# EAGLE board logger (EAGLE 8.1.0)
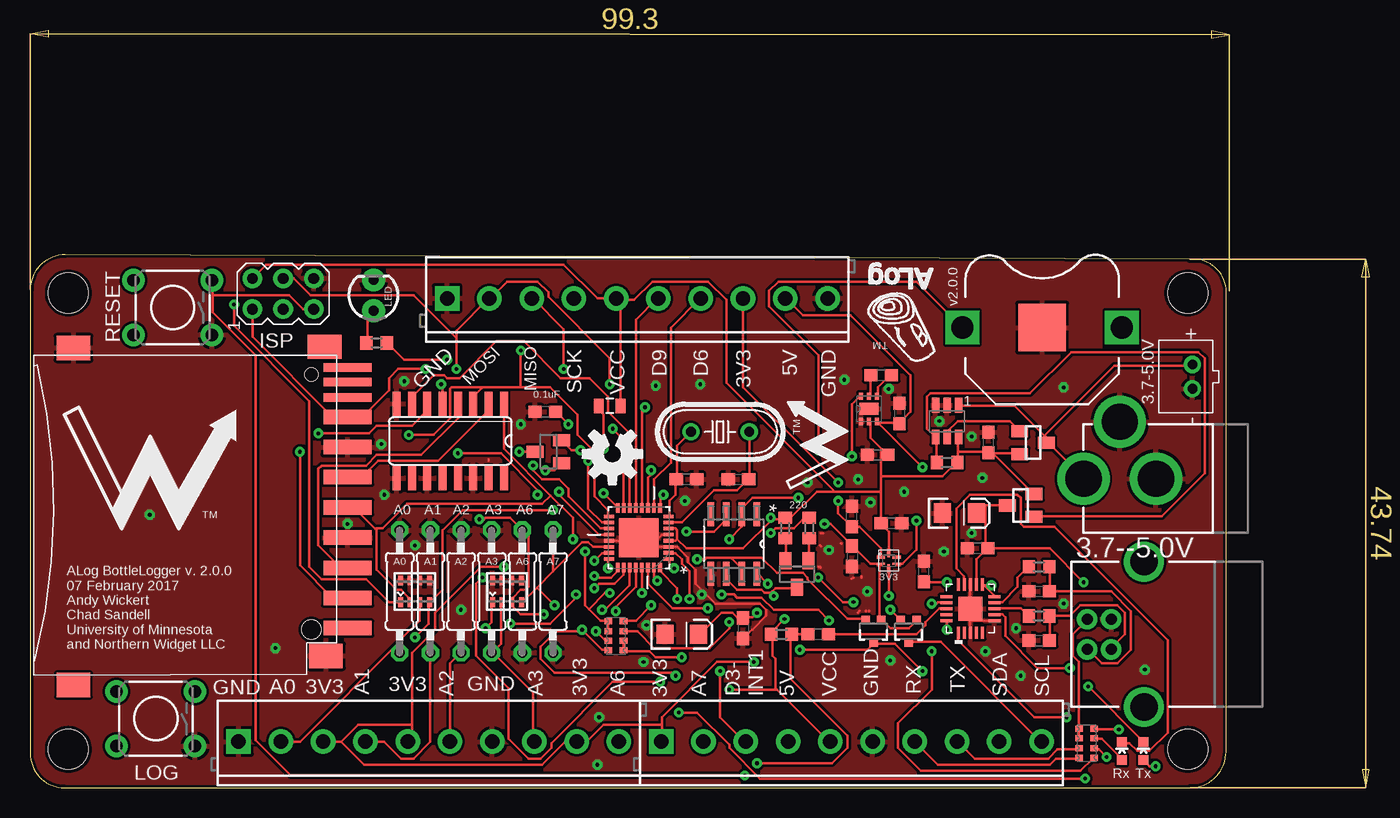
[diagram p0: board, top side]
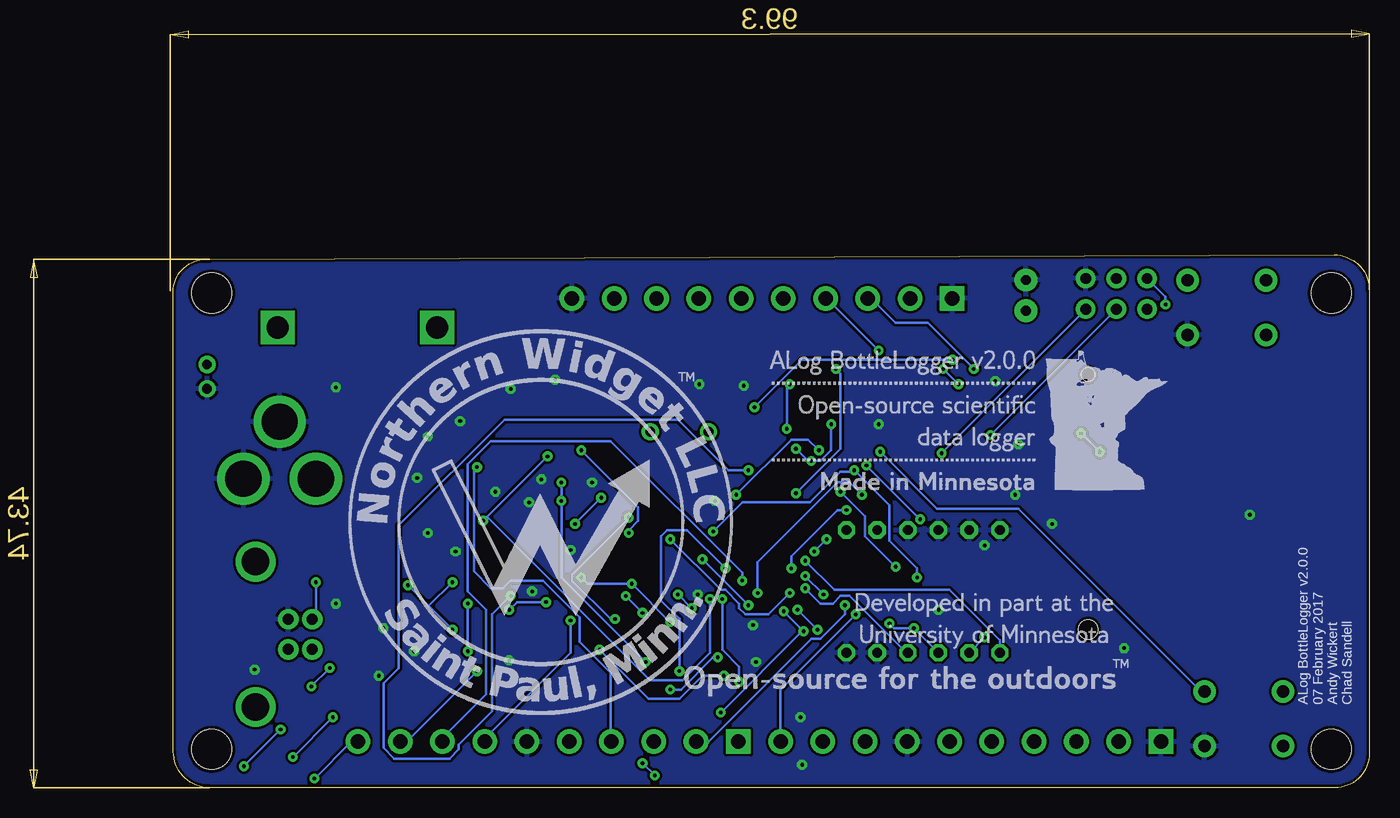
[diagram p1: board, bottom side, seen from below]

Size 99.05 x 44.12 mm. Coordinates in mm from the lower left corner, seen from the top.
Outline: 99.05,41.32 arc90 96.05,43.74 2.91,44.12 arc90 0,41.21 0,2.85 arc90 2.85,0 96.06,0 arc90 99.05,2.98 99.05,41.32
Copper layers (1*16): Top 0.035mm / dielectric 1.5mm / Bottom 0.035mm
Design rules "SparkFun *": minimum track width 8mil, minimum drill 12mil, track to track 8mil, track to pad 8mil, pad to pad 8mil, via to via 8mil, smd to smd 8mil, copper to edge 10mil, drill to drill 8mil, minimum pad ring 12mil, minimum via ring 10mil, stop-mask expansion 4mil, vias tented up to drill 25mil, thermal gap 10mil
Net classes: 0 default: width 0.203 mm, drill 0.305 mm; 1 power: width 0.305 mm, drill 0.508 mm; 2 gnd: width 0.61 mm, drill 0.508 mm, clearance 0.203 mm; 3 usbvcc: width 0.508 mm, drill 0.508 mm, clearance 0.152 mm; 4 aref: width 0.406 mm

## Footprints (pad centres in the part's own frame; a part is rotated, then mirrored left to right if it is on the bottom)
6-TMLF = smd 0.7 x 0.2: 1 -0.65,0.25; 2 -0.65,-0.25; 4 0.65,-0.25; 5 0.65,0.25 | smd 0.2 x 0.7: 3 0,-0.65; 6 0,0.65
SON65P200X200X80-7N = smd 0.61 x 0.356: 1 -1.041,0.66; 2 -1.041,0; 3 -1.041,-0.66; 4 1.041,-0.66; 5 1.041,0; 6 1.041,0.66 | smd 0.991 x 1.6: 7 0,0
0207/10 = drill 0.813 octagon: 1 -5.08,0; 2 5.08,0
C0603 = smd 1.1 x 1: 1 -0.85,0; 2 0.85,0
CECJ-1206 = smd 0.406 x 0.813: A1 -1.2,-0.9; A2 -1.2,0.9; B1 -0.4,-0.9; B2 -0.4,0.9; C1 0.4,-0.9; C2 0.4,0.9; D1 1.2,-0.9; D2 1.2,0.9
EIA3216 = smd 1.4 x 1.6: A 1.4,0; C -1.4,0
BATTCON_12MM_PTH = smd 3.962 x 3.962: GND 0,0 | drill 1.854 square: VCC@1 -6.604,0; VCC@2 6.604,0
JST-PH-2-THM = drill 0.8 pad 1.422: 1 1,0; 2 -1,0
SOT23C = smd 1 x 1.4: 1 -0.95,-1.1; 2 0.95,-1.1; 3 0,1.1
R0603 = smd 1 x 1.1: 1 -0.85,0; 2 0.85,0
SCREWTERMINAL-3.5MM-8 = drill 1.2 pad 2.032 square: 1 0,0 | drill 1.2 pad 2.032: 2 3.5,0; 3 7,0; 4 10.5,0; 5 14,0; 6 17.5,0; 7 21,0; 8 24.5,0; 9 28,0; 10 31.5,0
TSOT23-6 = smd 0.622 x 1.22: 1 -0.95,-1.31; 2 0,-1.31; 3 0.95,-1.31; 4 0.95,1.31; 5 0,1.31; 6 -0.95,1.31
AVRISP = drill 0.9 pad 1.626: 1 -1.27,2.54; 2 1.27,2.54; 3 -1.27,0; 4 1.27,0; 5 -1.27,-2.54; 6 1.27,-2.54
POWER_JACK_PTH = drill 2.997 pad 4.318: GND 0,7.7; GNDBREAK 4.7,10.7; PWR 0,13.7
STAND-OFF = hole 3.302: 0,0
USB-B-PTH = drill 0.914 pad 1.676: D+ 0,1.25; D- 1.981,1.25; GND 0,-1.25; VBUS 1.981,-1.25 | drill 2.286: S1 -2.718,-6.02; S2 -2.718,6.02
0805 = smd 0.8 x 1.2: 1 -0.9,0; 2 0.9,0
LED3MM = drill 0.813 pad 1.88: A -1.27,0; K 1.27,0
LED-0603 = smd 0.8 x 0.8: A 0,-0.75; C 0,0.75
TACTILE-PTH = drill 1.016 pad 1.88: 1 -3.251,2.261; 2 3.251,2.261; 3 -3.251,-2.261; 4 3.251,-2.261
SO16 = smd 0.66 x 2.032: 1 -4.445,-3.073; 2 -3.175,-3.073; 3 -1.905,-3.073; 4 -0.635,-3.073; 5 0.635,-3.073; 6 1.905,-3.073; 7 3.175,-3.073; 8 4.445,-3.073; 9 4.445,3.073; 10 3.175,3.073; 11 1.905,3.073; 12 0.635,3.073; 13 -0.635,3.073; 14 -1.905,3.073; 15 -3.175,3.073; 16 -4.445,3.073
QFN50P500X500X100-33N = smd 0.813 x 0.305: 1 -2.464,1.753; 2 -2.464,1.245; 3 -2.464,0.762; 4 -2.464,0.254; 5 -2.464,-0.254; 6 -2.464,-0.762; 7 -2.464,-1.245; 8 -2.464,-1.753; 17 2.464,-1.753; 18 2.464,-1.245; 19 2.464,-0.762; 20 2.464,-0.254; 21 2.464,0.254; 22 2.464,0.762; 23 2.464,1.245; 24 2.464,1.753 | smd 0.305 x 0.813: 9 -1.753,-2.464; 10 -1.245,-2.464; 11 -0.762,-2.464; 12 -0.254,-2.464; 13 0.254,-2.464; 14 0.762,-2.464; 15 1.245,-2.464; 16 1.753,-2.464; 25 1.753,2.464; 26 1.245,2.464; 27 0.762,2.464; 28 0.254,2.464; 29 -0.254,2.464; 30 -0.762,2.464; 31 -1.245,2.464; 32 -1.753,2.464 | smd 3.251 x 3.251: 33 0,0
SUPER-SOT3 = smd 1 x 1.4: 1 -0.95,-1.1; 2 0.95,-1.1; 3 0,1.1
SOT323 = smd 0.7 x 0.7: 1 -0.65,-0.925; 2 0.65,-0.925; 3 0,0.925
0603-ARC = smd 0.5 x 0.65: 1 -1.2,-0.625; 2 -0.4,-0.625; 3 0.4,-0.625; 4 1.2,-0.625; 5 1.2,0.625; 6 0.4,0.625; 7 -0.4,0.625; 8 -1.2,0.625
06132 = smd 1.2 x 4: 1 6.9,0.9; 2 4.4,0.9; 3 1.9,0.9; 4 -0.6,0.9; 5 -3.1,0.9; 6 -5.6,0.9; 7 -8.1,0.9; 9 9.4,0.9 | smd 0.7 x 4: 8 -9.7,0.9; CD -11,0.9; WP -12.2,0.9 | smd 2 x 2.8: GP -13.8,-21.8; GP2 14.1,-21.8; GP3 11.7,-0.9; GP4 -13.9,-1 | hole 1.1: -11.6,-2.1 | hole 1.6: 9.5,-2.1
21-0041B_8 = smd 1.981 x 0.533: 1 -2.464,1.905; 2 -2.464,0.635; 3 -2.464,-0.635; 4 -2.464,-1.905; 5 2.464,-1.905; 6 2.464,-0.635; 7 2.464,0.635; 8 2.464,1.905
QFN20 = smd 1 x 0.25: 1 -2.032,0.968; 2 -2.032,0.468; 3 -2.032,-0.032; 4 -2.032,-0.532; 5 -2.032,-1.032; 11 1.968,-1.032; 12 1.968,-0.532; 13 1.968,-0.032; 14 1.968,0.468; 15 1.968,0.968 | smd 0.25 x 1: 6 -1.032,-2.032; 7 -0.532,-2.032; 8 -0.032,-2.032; 9 0.468,-2.032; 10 0.968,-2.032; 16 0.968,1.968; 17 0.468,1.968; 18 -0.032,1.968; 19 -0.532,1.968; 20 -1.032,1.968 | smd 2 x 2: 21 -0.032,-0.032
HC49U-V = drill 0.813: 1 -2.413,0; 2 2.413,0

## Placement (x,y rotation side)
3V3  [6-TMLF]  71.11,18.8 0 top
5V_CHARGE_PUMP  5V  [SON65P200X200X80-7N]  69.47,31.37 90 top
A0  [0207/10]  30.6,16.26 270 top
A1  [0207/10]  33.14,16.26 270 top
A2  [0207/10]  35.68,16.26 270 top
A3  [0207/10]  38.22,16.26 270 top
A6  [0207/10]  40.76,16.26 270 top
A7  [0207/10]  43.3,16.26 270 top
ADECOUP  0.1uF  [C0603]  42.66,31.11 180 top
C1  0.1uF  [C0603]  74.03,17.91 90 top
C14  10nF  [CECJ-1206]  31.87,16.26 0 top
C15  10nF  [CECJ-1206]  39.49,16.26 0 top
C17  0.1uF  [C0603]  78.48,19.81 180 top
C21  10uF  [EIA3216]  76.95,22.73 0 top
C_BOOST_1  4.7uF  [C0603]  70.19,27.56 0 top
C_BOOST_2  2.2uF  [C0603]  70.48,34.16 0 top
C_BOOST_3  2.2uF  [C0603]  71.99,30.99 270 top
CLOCK_BATT  3V Backup Battery  [BATTCON_12MM_PTH]  83.81,38.1 0 top
CLOCK_BATT_DECOUP  0.1uF  [C0603]  59.05,13.21 270 top
CLOCK_BATT_DECOUPLE  10uF  [EIA3216]  53.97,12.7 0 top
CLOCK_CIN1  1uF  [C0603]  71.32,21.91 0 top
CLOCK_CIN2  1uF  [C0603]  68.05,22.45 90 top
CLOCK_CIN3  1uF  [C0603]  68.07,19.16 270 top
CN1  [JST-PH-2-THM]  96.26,34.04 90 top
COUT  1uF  [C0603]  79.36,28.57 90 top
COUT1  0.1uF  [C0603]  65.27,12.7 180 top
CX0  33pF  [C0603]  58.66,25.53 0 top
CX1  33pF  [C0603]  54.35,25.53 180 top
CX2  33pF  [C0603]  83.56,16.26 0 top
CX3  33pF  [C0603]  83.56,12.19 0 top
D1  BAT54C  [SOT23C]  63.51,17.69 180 top
D2  BAT54  [SOT23C]  42.92,27.81 90 top
D+  27ohm  [R0603]  83.56,14.22 0 top
D-  27ohm  [R0603]  83.56,18.29 0 top
H0  [SCREWTERMINAL-3.5MM-8]  17.26,3.81 0 top
H1  [SCREWTERMINAL-3.5MM-8]  52.26,3.81 0 top
H3  [SCREWTERMINAL-3.5MM-8]  34.53,40.51 0 top
IC1  LTC4412  [TSOT23-6]  75.94,30.35 180 top
ISP  AVRISP-6  [AVRISP]  20.94,40.89 90 top
J1  POWER_JACKPTH  [POWER_JACK_PTH]  100.94,25.59 90 top
JP1  STAND-OFF  [STAND-OFF]  3.17,3.17 0 top
JP2  STAND-OFF  [STAND-OFF]  95.88,40.96 90 top
JP3  STAND-OFF  [STAND-OFF]  95.88,3.17 90 top
JP4  STAND-OFF  [STAND-OFF]  3.17,40.96 0 top
JP5  USB-B  [USB-B-PTH]  89.52,12.7 180 top
L_LPF  10uH  [0805]  48,31.62 180 top
LED  [LED3MM]  28.44,40.77 90 top
LED1  Yellow  [LED-0603]  90.41,3.05 0 top
LED2  Blue  [LED-0603]  92.19,3.05 0 top
LOG  LOG  [TACTILE-PTH]  10.4,5.71 180 top
LOGO1  OSHW-LOGOM  [OSHW-LOGO-M]  48.22,27.62 180 top
LSHIFT  4050D  [SO16]  34.79,28.7 180 top
MCU  ATMEGA328P-MU  [QFN50P500X500X100-33N]  50.41,20.7 180 top
Q1  FDN360P  [SUPER-SOT3]  83.05,28.57 270 top
Q2  FDN360P  [SUPER-SOT3]  82.03,23.37 90 top
Q3  2N7002PW  [SOT323]  69.84,12.95 180 top
Q4  2N7002PW  [SOT323]  72.76,12.95 180 top
R_LED  220  [R0603]  28.69,36.83 180 top
R_RESET  10k  [R0603]  62.22,12.7 180 top
RCKL1  220  [R0603]  62.52,21.5 90 top
RCLK2  220  [R0603]  64.52,21.5 90 top
RESET  Reset  [TACTILE-PTH]  11.8,39.75 180 top
RN1  1K  [0603-ARC]  87.49,3.68 90 top
RN2  3.3K  [0603-ARC]  48.5,12.57 90 top
RSTAT  470k  [R0603]  75.94,26.92 0 top
SD  SDMMC06132  [06132]  25.39,22.61 270 top
U1  DS3231MZ/V+T  [21-0041B_8]  58.28,20.19 270 top
U2  FT231X-Q  [QFN20]  77.84,14.86 90 top
U$1  NWLOGO  [NWLOGO]  9.9,26.04 0 top
U$2  ALOG_LOGO_V1_5.5MM  [ALOG_LOGO_V1_SMALL]  72.07,38.22 180 top
U$3  NWLOGO_MED  [NWLOGO_MED]  64.76,28.32 90 top
U$9  ALOG-BACKSILK-2.0  [ALOG-BACKSILK-2.0]  84.57,5.97 0 top
XTAL  8MHz  [HC49U-V]  57.14,29.46 0 top

## Library data of the parts
3V3 = csandell
5V_CHARGE_PUMP = ti_by_element14; MPN: TPS60150DRVR; OC_FARNELL: -; OC_NEWARK: 45P8283; PACKAGE: SON-6; SUPPLIER: Texas Instruments
A0 A1-A3 A6 A7 ADECOUP C1 C17 C_BOOST_1-C_BOOST_3 CX0 CX1-CX3 R_LED = resistor
C14 C15 = rc-master-smd
C21 CLOCK_BATT_DECOUPLE = SparkFun-Passives
CLOCK_BATT J1 JP1-JP4 L_LPF LED XTAL = SparkFun
CLOCK_BATT_DECOUP CLOCK_CIN1-CLOCK_CIN3 COUT COUT1 D+ D- R_RESET RCKL1 RCLK2 RSTAT = rcl
CN1 ISP SD = adafruit
D1 D2 = semicon-smd-ipc
H0 H1 H3 = SparkFun-Connectors
IC1 U$1-U$3 = awickert
JP5 = SparkFun-Connectors; PROD_ID: CONN-08278
LED1 LED2 = SparkFun-LED
LOG RESET = SparkFun-Electromechanical; PROD_ID: SWCH-08441
LOGO1 = SparkFun-Aesthetics
LSHIFT = 40xx
MCU = Atmel_By_element14_Batch_1-00; MPN: ATMEGA328P-MU; OC_FARNELL: 1748522; OC_NEWARK: 26R2526; PACKAGE: QFN-32; SUPPLIER: Atmel
Q1 Q2 = transistor-power
Q3 Q4 = SparkFun-DiscreteSemi
RN1 RN2 = resistor-dil; OC_FARNELL: unknown; OC_NEWARK: unknown
U1 = Maxim-DS3231MZ_8-SOIC; MANUFACTURER_NAME: Maxim; MANUFACTURER_PART_NUMBER: DS3231MZ/V+T; VENDOR: Maxim
U2 = FT231X
U$9 = awickert_tmp

## Nets
5V: 5V_CHARGE_PUMP.3 C_BOOST_3.2 H1.4 H3.9
+3V3: 3V3.1 CLOCK_CIN2.1 H0.3 H0.5 H0.9 H1.1 H3.8 MCU.20
A0: A0.2 C14.C1 H0.2 MCU.23
A1: A1.2 C14.D1 H0.4 MCU.24
A2: A2.2 C15.A1 H0.6 MCU.25
A3: A3.2 C15.B1 H0.8 MCU.26
A6: A6.1 C15.C1 H0.10 MCU.19
A7: A7.1 C15.D1 H1.2 MCU.22
AVCC: ADECOUP.1 L_LPF.2 MCU.18
BAT: CLOCK_BATT_DECOUP.1 CLOCK_BATT_DECOUPLE.A D1.3 U1.6
CLK: H3.4 ISP.3 LSHIFT.3 MCU.17
CS-SD: LSHIFT.7 MCU.14
D3-INT1: H1.3 MCU.1
D4-SENSE_LDO_SWITCH: 3V3.4 5V_CHARGE_PUMP.6 MCU.2
D5_MANUAL_LOG: D2.2 MCU.9
D6-EXT: H3.7 MCU.10
D7-CLOCK_SD_SWITCH: 3V3.3 MCU.11
D8_LED: MCU.12 R_LED.1
D9-CS-EXT: H3.6 MCU.13
DI: H3.2 ISP.4 LSHIFT.5 MCU.15
DO: H3.3 ISP.1 MCU.16 SD.7
DTR: COUT1.1 U2.18
GND: 3V3.5 5V_CHARGE_PUMP.1 5V_CHARGE_PUMP.7 A0.1 A1.1 A2.1 A3.1 A6.2 A7.2 ADECOUP.2 C1.2 C14.A2 C14.B2 C14.C2 C14.D2 C15.A2 C15.B2 C15.C2 C15.D2 C17.2 C21.C C_BOOST_1.1 C_BOOST_3.1 CLOCK_BATT.GND CLOCK_BATT_DECOUP.2 CLOCK_BATT_DECOUPLE.C CLOCK_CIN1.2 CLOCK_CIN2.2 CLOCK_CIN3.2 CN1.2 COUT.2 CX0.1 CX1.1 CX2.1 CX3.1 H0.1 H0.7 H1.6 H3.1 H3.10 IC1.2 IC1.3 ISP.6 J1.GND J1.GNDBREAK JP5.GND LED.K LOG.1 LSHIFT.8 LSHIFT.9 LSHIFT.11 LSHIFT.14 MCU.3 MCU.5 MCU.21 MCU.33 RESET.1 SD.3 SD.6 SD.GP SD.GP3 U1.5 U2.3 U2.6 U2.13 U2.21
INT0: D2.1 MCU.32 U1.3
LED+: LED.A R_LED.2
N$1: D1.1 RCLK2.1
N$2: CLOCK_BATT.VCC@1 RCLK2.2
N$3: CX3.2 D+.2 JP5.D+
N$4: CX2.2 D-.2 JP5.D-
N$5: LED2.A RN1.4
N$6: LED2.C U2.7
N$7: IC1.4 Q2.1 RSTAT.1
N$8: IC1.5 Q1.1
N$9: LED1.A RN1.3
N$10: LED1.C U2.14
N$11: D2.3 LOG.3
N$13: D-.1 U2.9
N$14: 5V_CHARGE_PUMP.4 C_BOOST_2.2
N$15: 5V_CHARGE_PUMP.5 C_BOOST_2.1
N$16: D+.1 U2.8
N$17: C1.1 U2.10 U2.11 U2.20
N$27: RN1.1 U2.17
N$29: RN1.2 U2.1
N$67: D1.2 RCKL1.1
RESET: COUT1.2 ISP.5 MCU.29 R_RESET.1 RESET.3
RX-I: H1.7 MCU.30 RN1.8
SCL: H1.10 MCU.28 Q4.3 RN2.7
SCL_3V3: Q4.2 RN2.3 U1.8
SD_CLK: LSHIFT.2 SD.5
SD_CS: LSHIFT.6 SD.1
SD_DI: LSHIFT.4 SD.2
SDA: H1.9 MCU.27 Q3.3 RN2.8
SDA_3V3: Q3.2 RN2.4 U1.7
TX-O: H1.8 MCU.31 RN1.7
VBAT: CN1.1 IC1.1 J1.PWR Q1.3
VCC: 3V3.6 5V_CHARGE_PUMP.2 C14.A1 C_BOOST_1.2 CLOCK_CIN1.1 COUT.1 H1.5 H3.5 IC1.6 ISP.2 L_LPF.1 MCU.4 MCU.6 Q1.2 Q2.2 R_RESET.2 RCKL1.2 RN2.1 RN2.2 RSTAT.2
VDD: 3V3.2 C14.B1 CLOCK_CIN3.1 LSHIFT.1 Q3.1 Q4.1 RN2.5 RN2.6 SD.4 U1.2
VUSB: C17.1 C21.A JP5.VBUS Q2.3 RN1.5 RN1.6 U2.12
X0: CX0.2 MCU.7 XTAL.2
X1: CX1.2 MCU.8 XTAL.1

## Tracks (layer width: path | path; a pad name or v marks a point on that pad's centre or on a via)
5V  (via drill 0.3)
  Top 0.203: 70.22,30.23 71.87,30.23 C_BOOST_3.2 72,30.23 72.89,31.11 72.89,34.16 67.93,39.12 64,39.12 62.6,40.51 H3.9 | 70.22,30.23 v73.9,26.54 | 70.22,30.23 5V_CHARGE_PUMP.3
  Bottom 0.203: v73.9,26.54 74.16,26.29 74.16,17.91 72.76,16.51 71.74,16.51 71.11,17.14 68.44,17.14 65.39,14.1 65.39,12.06 62.86,9.53 62.86,3.81 H1.4
+3V3  (via drill 0.3)
  Top 0.203: v66.92,23.75 66.92,22.73 67.93,21.72 CLOCK_CIN2.1 68.68,21.6 70.47,19.81 70.47,19.06 3V3.1 | v66.92,25.27 59.05,33.15 59.05,40.51 H3.8 | MCU.20 47.11,20.95 43.8,24.26 v43.8,24.51 | v39.23,18.29 37.33,18.29 33.52,14.48 33.52,13.08 31.61,11.18 31.61,5.21 | 31.61,5.21 31.61,4.06 31.36,3.81 H0.5 | 25.77,3.81 H0.3 | 25.77,3.81 27.17,5.21 31.61,5.21 | 25.77,3.81 27.68,1.91 42.41,1.91 44.31,3.81 H0.9 46.09,3.81 47.49,5.21 52.31,5.21 | v59.93,10.41 56.89,10.41 52.31,5.84 52.31,5.21 | 52.31,5.21 52.31,3.81 H1.1
  Bottom 0.203: v66.92,25.27 v66.92,23.75 66.92,17.4 v59.93,10.41 | v43.8,24.51 41.77,22.48 41.77,20.83 v39.23,18.29
A0  (via drill 0.3)
  Top 0.203: A0.2 30.6,12.06 | 30.6,12.06 30.6,12.19 32.25,13.84 32.25,15.24 C14.C1 | v46.73,18.8 47.36,19.43 47.87,19.43 MCU.23 | H0.2 22.34,3.81 30.6,12.06
  Bottom 0.203: v46.73,18.8 44.31,16.38 34.79,16.38 30.6,12.19 A0.2
A1  (via drill 0.3)
  Top 0.203: v31.87,12.45 33.01,13.59 33.01,15.24 C14.D1 33.14,15.37 34.15,16.38 34.15,21.34 35.8,22.99 v43.3,22.99 | v47.87,18.16 47.87,18.92 MCU.24 | H0.4 29.33,3.81 30.72,2.41 31.74,2.41 33.14,3.81 A1.2
  Bottom 0.203: A1.2 v31.87,12.45 | v47.87,18.16 47.87,19.18 44.06,22.99 v43.3,22.99
A2  (via drill 0.3)
  Top 0.203: v37.71,13.21 38.22,13.72 38.22,15.24 C15.A1 | v46.73,17.53 46.85,17.4 48.12,17.4 48.63,17.91 48.63,18.16 MCU.25 | v45.2,16 45.2,15.75 43.04,13.59 v39.74,13.59 | A2.2 34.79,10.29 34.79,3.81 H0.6
  Bottom 0.203: A2.2 v37.71,13.21 39.36,13.21 v39.74,13.59 | v45.2,16 v46.73,17.53
A3  (via drill 0.3)
  Top 0.203: C15.B1 38.98,15.24 38.98,11.94 A3.2 38.34,11.18 41.65,7.87 41.65,3.81 H0.8 | v46.73,16.51 47.11,16.89 48.38,16.89 49.14,17.65 49.14,18.16 MCU.26
  Bottom 0.203: v46.73,16.51 45.46,15.24 44.44,15.24 43.8,15.88 43.04,15.88 38.34,11.18 A3.2
A6  (via drill 0.3)
  Top 0.203: MCU.19 47.23,21.46 44.57,24.13 44.57,24.77 43.8,25.53 42.41,25.53 41.65,26.29 v41.65,26.67 | v37.2,22.23 37.58,22.23 37.71,22.35 39.74,22.35 A6.1 41.27,20.83 41.27,16.64 41.01,16.38 40.63,16.38 40,15.75 40,15.37 C15.C1 40,15.24 40,14.99 40.63,14.35 v42.54,14.35
  Bottom 0.203: v37.2,22.23 v41.65,26.67 | v42.54,14.35 48.76,8.13 H0.10
A7  (via drill 0.3)
  Top 0.203: 43.3,17.91 41.96,16.57 | 41.96,16.57 40.76,15.37 C15.D1 | A7.1 43.3,17.91 | MCU.22 46.6,19.94 46.22,20.32 45.71,20.32 43.3,17.91 | 41.96,16.57 v43.42,15.11
  Bottom 0.203: H1.2 54.73,3.81 46.22,12.32 45.46,12.32 43.42,14.35 v43.42,15.11
AVCC  (via drill 0.3)
  Top 0.203: v46.22,27.05 46.22,23.11 47.36,21.97 47.87,21.97 MCU.18 | v47.49,28.07 47.49,30.86 47.11,31.24 L_LPF.2 | v44.57,30.1 43.55,31.11 ADECOUP.1
  Bottom 0.203: v47.49,28.07 46.47,27.05 v46.22,27.05 45.46,27.05 44.57,27.94 v44.57,30.1
BAT  (via drill 0.3)
  Top 0.203: 59.05,14.1 58.54,14.1 58.16,14.48 57.27,14.48 55.49,12.7 CLOCK_BATT_DECOUPLE.A | 61.33,16.13 61.71,16.51 63.49,16.51 D1.3 | 61.33,16.13 60.82,16.13 60.57,16.38 58.54,16.38 57.65,17.27 U1.6 | 59.05,14.1 59.81,14.1 v60.19,14.48 | 61.33,16.13 v61.59,15.88 | 59.05,14.1 CLOCK_BATT_DECOUP.1
  Bottom 0.203: v61.59,15.88 v60.19,14.48
CLK  (via drill 0.3)
  Top 0.203: 40.63,33.15 37.46,33.15 37.39,33.08 | 40.63,33.15 43.04,33.15 45.33,30.86 45.33,29.21 46.98,27.56 46.98,26.8 46.73,26.54 46.73,24.13 47.87,22.99 47.87,22.48 MCU.17 | 37.39,33.08 36.69,32.38 LSHIFT.3 | v31.36,29.21 33.39,29.21 34.79,30.61 34.79,33.02 34.91,33.15 37.33,33.15 37.39,33.08 | 40.63,33.15 v40.63,36.2
  Bottom 0.203: v31.36,29.21 ISP.3 | v40.63,36.2 44.95,40.51 H3.4
CS-SD
  Top 0.203: MCU.14 49.65,29.34 47.87,31.11 47.87,32.38 46.34,33.91 43.93,33.91 40.88,36.96 38.6,36.96 35.55,33.91 34.53,33.91 34.28,34.16 33.39,34.16 31.61,32.38 LSHIFT.7
D3-INT1  (via drill 0.3)
  Top 0.203: v53.33,18.16 52.95,18.54 52.95,18.92 MCU.1 | v57.14,9.65 57.14,5.84 59.17,3.81 H1.3
  Bottom 0.203: v53.33,18.16 56.51,21.34 58.16,21.34 58.66,20.83 58.66,15.49 57.14,13.97 v57.14,9.65
D4-SENSE_LDO_SWITCH  (via drill 0.3)
  Top 0.203: v68.06,27.43 68.06,31.75 68.7,32.38 5V_CHARGE_PUMP.6 | v73.4,22.1 73.4,19.68 72.25,18.54 71.87,18.54 3V3.4 | v54.6,15.62 54.6,17.91 53.97,18.54 53.97,18.92 53.46,19.43 52.95,19.43 MCU.2
  Bottom 0.203: v73.4,22.1 73.08,22.42 | 73.08,22.42 v68.06,27.43 | v54.6,15.62 54.6,11.18 56.89,8.89 59.55,8.89 73.08,22.42
D5_MANUAL_LOG  (via drill 0.3)
  Top 0.203: v52.44,24.26 52.19,24 52.19,23.24 MCU.9 | v45.58,27.94 44.82,27.94 44.06,28.7 D2.2
  Bottom 0.203: v52.44,24.26 47.87,28.83 46.47,28.83 v45.58,27.94
D6-EXT
  Top 0.203: MCU.10 51.68,23.24 51.68,25.53 53.08,26.92 53.08,38.1 55.49,40.51 H3.7
D7-CLOCK_SD_SWITCH  (via drill 0.3)
  Top 0.203: v71.11,15.88 3V3.3 | v51.43,26.29 51.43,25.91 51.17,25.65 MCU.11
  Bottom 0.203: v71.11,15.88 72.63,14.35 72.63,6.35 75.43,3.56 75.43,3.17 76.19,2.41 80.76,2.41 81.65,3.3 81.65,8.64 80.38,9.91 80.38,21.72 71.62,30.48 57.27,30.48 53.08,26.29 v51.43,26.29
D8_LED  (via drill 0.3)
  Top 0.203: MCU.12 50.66,31.24 v50.92,31.5 | v34.53,35.43 30.98,35.43 29.58,36.83 R_LED.1
  Bottom 0.203: v50.92,31.5 46.98,35.43 v34.53,35.43
D9-CS-EXT
  Top 0.203: MCU.13 50.16,38.73 51.93,40.51 H3.6
DI  (via drill 0.3)
  Top 0.203: v48.25,29.72 49.14,28.83 49.14,23.24 MCU.15 | v48,33.4 48,35.56 42.92,40.64 42.92,41.02 42.03,41.91 39.49,41.91 38.09,40.51 H3.2 37.96,40.51 35.3,37.85 35.3,37.21 | LSHIFT.5 34.15,33.27 v34.03,33.4 | 35.3,37.21 v35.3,34.67 | ISP.4 21.83,42.16 23.23,40.77 31.74,40.77 35.3,37.21
  Bottom 0.203: v48.25,29.72 48.25,33.15 v48,33.4 | v35.3,34.67 v34.03,33.4
DO  (via drill 0.3)
  Top 0.203: ISP.1 18.4,37.34 25.01,30.73 26.28,30.73 SD.7 26.41,30.73 27.55,30.73 29.71,32.89 29.71,33.91 30.47,34.67 v32.76,34.67 | v47.49,24.38 48.63,23.24 MCU.16 | v44.19,34.67 44.19,37.97 41.65,40.51 H3.3
  Bottom 0.203: v47.49,24.38 43.8,28.07 43.8,34.29 v44.19,34.67 | v32.76,34.67 36.57,38.48 39.23,38.48 41.27,40.51 H3.3
DTR
  Top 0.203: COUT1.1 73.4,12.7 74.16,13.46 74.16,13.72 75.3,14.86 75.81,14.86 U2.18
GND  (via drill 0.3)
  Top 0.203: 77.84,13.84 77.84,14.73 U2.21 | 77.84,13.84 77.84,12.83 U2.3 | U2.13 77.84,16.76 77.84,14.86 U2.21 | MCU.21 50.16,20.45 MCU.33 | 51.3,19.94 51.04,19.94 50.41,20.57 MCU.33 | 51.3,19.94 MCU.3 53.58,19.94 54.47,19.05 54.47,18.67 55.11,18.03 55.11,16.89 56.76,15.24 60.44,15.24 60.95,14.73 60.95,14.22 59.81,13.08 59.77,13.08 CLOCK_BATT_DECOUP.2 | MCU.5 52.31,20.95 51.3,19.94 | 51.3,19.94 MCU.33 | 77.84,13.84 79.87,13.84 U2.6 | 77.84,13.84 U2.21 | 65.27,18.29 65.37,18.24 | 65.37,18.24 65.43,18.21 | 68.57,14.48 68.67,14.63 | 68.82,17.53 68.85,17.39 | 68.19,18.16 68.02,18.26 | 67.93,18.35 67.93,18.16 CLOCK_CIN3.2 | 65.39,18.29 65.37,18.24 | 67.17,20.19 67.16,20.25 | 65.39,20.07 65.48,19.98 | 65.65,21.08 65.48,21.08 | 69.46,14.61 69.46,14.63 | 68.19,17.4 68.02,17.3 | 69.2,14.61 69.2,14.63 | 37.96,27.18 37.96,27.05
  other vias: 54.22,23.75 66.16,19.68 77.97,29.08 75.3,30.35 71.11,33.02 77.97,21.08 69.59,23.62 72.38,24.51 85.59,15.24 82.03,9.27 81.65,13.21 78.86,25.65 69.33,16.26 40.63,30.1 29.33,24.26 26.28,21.84 29.07,28.45 30.98,33.66 31.87,20.07 51.04,13.46 50.79,10.41 47.11,5.84 20.31,11.56 55.49,33.4 67.43,33.78 68.57,25.53 75.68,19.56 85.59,33.15 51.81,33.27 71.24,10.54 79.11,11.3 35.68,14.73 55.62,16 64.38,25.27 46.98,1.91 92.32,9.78 9.9,22.61
  pour Bottom: -0.33,44.45 -0.33,-0.32 99.37,-0.32 99.37,44.45
  pour Top: -0.65,44.77 -0.65,-0.64 99.68,-0.64 99.68,44.77
INT0  (via drill 0.3)
  Top 0.203: v53.58,15.62 53.58,16.51 52.19,17.91 52.19,18.16 MCU.32 | v52.19,8.76 48.25,8.76 43.17,3.68 43.17,3.3 42.28,2.41 41.27,2.41 39.61,4.06 39.61,8.26 36.95,10.92 36.95,16.89 v37.46,17.4 | v42.66,26.29 43.42,26.29 43.93,26.8 D2.1 | U1.3 57.65,22.23 56.63,21.21 v54.35,21.21
  Bottom 0.203: v53.58,15.62 53.58,11.43 52.19,10.03 v52.19,8.76 | v37.46,17.4 37.46,18.16 39.74,20.45 39.74,23.37 v42.66,26.29 42.66,26.16 43.8,26.16 46.34,23.62 51.93,23.62 v54.35,21.21
LED+
  Top 0.203: LED.A 27.93,38.99 27.93,36.83 R_LED.2
N$1
  Top 0.203: RCLK2.1 64.51,20.57 64.51,18.8 D1.1
N$2  (via drill 0.3)
  Top 0.203: v61.33,21.08 61.71,21.46 63.24,21.46 64,22.23 64.51,22.23 RCLK2.2 | v65.27,27.94 65.27,35.81 61.2,39.88 61.2,41.15 61.97,41.91 73.4,41.91 CLOCK_BATT.VCC@1
  Bottom 0.203: v61.33,21.08 61.33,21.34 60.57,22.1 60.57,23.24 v65.27,27.94
N$3
  Top 0.203: 84.44,14.22 84.44,12.19 CX3.2 | 84.44,14.22 86.1,14.22 86.98,15.11 90.03,15.11 90.67,14.48 90.67,12.7 89.52,11.56 JP5.D+ | 84.44,14.22 D+.2
N$4
  Top 0.203: 84.44,16.26 84.44,18.29 D-.2 | 84.44,16.26 89.52,16.26 91.18,14.61 91.18,11.43 90.03,10.29 88.76,10.29 87.62,11.43 JP5.D- | 84.44,16.26 CX2.2
N$5  (via drill 0.3)
  Top 0.203: v90.16,4.83 88.13,4.83 RN1.4 | v93.21,1.78 92.7,1.78 92.19,2.29 LED2.A
  Bottom 0.203: v93.21,1.78 v90.16,4.83
N$6  (via drill 0.3)
  Top 0.203: v87.62,8.38 LED2.C | v86.1,9.91 83.43,9.91 80.76,12.57 80.76,14.1 80.51,14.35 79.87,14.35 U2.7
  Bottom 0.203: v86.1,9.91 v87.62,8.38
N$7
  Top 0.203: RSTAT.1 75.05,26.92 75.05,28.96 IC1.4 74.92,29.08 74.28,29.72 74.28,32.38 74.54,32.64 82.79,32.64 86.22,36.07 96.76,36.07 97.27,35.56 97.27,26.04 93.72,22.48 83.17,22.48 Q2.1
N$8
  Top 0.203: IC1.5 75.94,29.46 76.82,30.35 81.14,30.35 81.91,29.59 Q1.1
N$9
  Top 0.203: RN1.3 88.13,4.06 88.76,4.06 90.41,2.41 LED1.A
N$10
  Top 0.203: LED1.C 90.41,3.68 91.05,3.68 91.68,3.05 92.7,3.05 94.22,4.57 94.22,12.19 84.83,21.59 82.29,21.59 82.03,21.84 82.03,24 81.78,24.26 77.84,24.26 76.7,23.11 76.7,18.16 77.33,17.53 77.33,16.89 U2.14
N$11  (via drill 0.3)
  Top 0.203: v40.5,27.81 D2.3
  Bottom 0.203: v40.5,27.81 35.8,23.11 29.07,23.11 13.96,8 13.71,8 LOG.3
N$13
  Top 0.203: U2.9 79.87,15.37 80.51,15.37 81.78,16.64 81.78,17.4 82.67,18.29 D-.1
N$14
  Top 0.203: 5V_CHARGE_PUMP.4 70.22,32.51 70.22,33.15 71.24,34.16 C_BOOST_2.2
N$15
  Top 0.203: 5V_CHARGE_PUMP.5 69.59,32.51 69.59,34.16 C_BOOST_2.1
N$16
  Top 0.203: U2.8 79.87,14.86 82.03,14.86 82.67,14.22 D+.1
N$17  (via drill 0.3)
  Top 0.203: v75.94,13.08 75.94,13.72 U2.20 | 78.98,16.76 v79.62,16.76 | 78.98,16.76 79.87,15.88 U2.10 | 78.98,16.76 U2.11 | v75.94,17.02 74.03,17.02 C1.1
  Bottom 0.203: v79.62,16.76 77.91,15.05 | 77.91,15.05 v75.94,13.08 | 77.91,15.05 v75.94,17.02
N$27  (via drill 0.3)
  Top 0.203: v74.67,11.3 74.67,8.13 71.87,5.33 71.87,3.3 73.78,1.4 86.98,1.4 88,2.41 RN1.1 | v74.67,15.24 75.05,15.24 75.17,15.37 75.81,15.37 U2.17
  Bottom 0.203: v74.67,15.24 v74.67,11.3
N$29  (via drill 0.3)
  Top 0.203: v89.14,2.54 88.51,3.17 88.13,3.17 RN1.2 | v85.84,5.84 83.17,5.84 76.82,12.19 76.82,12.83 U2.1
  Bottom 0.203: v85.84,5.84 v89.14,2.54
N$67
  Top 0.203: RCKL1.1 62.6,20.57 62.6,18.8 D1.2
RESET  (via drill 0.3)
  Top 0.203: v50.66,16.13 MCU.29 | v42.03,24.26 42.03,24.64 38.98,27.69 v35.42,27.69 | COUT1.2 R_RESET.1 62.98,12.7 62.98,9.02 67.68,4.32 67.68,3.3 66.41,2.03 v60.19,2.03 | v59.17,1.02 21.58,1.02 18.66,3.94 18.66,35.81 15.1,39.37 15.1,40.77 | 15.1,40.77 15.1,41.91 RESET.3 | ISP.5 22.6,39.62 21.45,40.77 15.1,40.77
  Bottom 0.203: v50.66,16.13 50.66,18.67 44.06,25.27 43.04,25.27 v42.03,24.26 | ISP.5 v35.42,27.69 | v59.17,1.02 v60.19,2.03
RX-I  (via drill 0.3)
  Top 0.203: RN1.8 86.86,2.41 84.95,2.41 84.44,1.91 75.17,1.91 H1.7 | MCU.30 51.17,16.89 53.2,14.86 v56.12,14.86 | v57.27,16 58.28,16 58.54,15.75 60.57,15.75 61.59,14.73 65.27,14.73 v66.16,13.84
  Bottom 0.203: v57.27,16 v56.12,14.86 | v66.16,13.84 66.16,11.18 73.14,4.19 73.14,3.81 H1.7
SCL  (via drill 0.3)
  Top 0.203: v46.85,12.95 47.62,12.19 47.87,12.19 RN2.7 | v48.5,14.61 48.5,14.99 50.16,16.64 MCU.28 | Q4.3 72.76,12.06 75.43,12.06 83.68,3.81 H1.10 | v53.71,6.22 55.23,6.22 57.9,3.56 57.9,3.3 60.44,0.76 v87.37,0.76
  Bottom 0.203: v48.5,14.61 v46.85,12.95 46.98,12.95 v53.71,6.22 | v87.37,0.76 84.32,3.81 H1.10
SCL_3V3  (via drill 0.3)
  Top 0.203: v57.9,13.72 57.9,13.21 56.25,11.56 51.68,11.56 50.28,12.95 49.14,12.95 RN2.3 | v61.08,16.89 60.19,17.78 U1.8 | v71.24,14.73 72,13.97 Q4.2 | v68.19,15.37 67.3,15.37 v65.27,17.4
  Bottom 0.203: v57.9,13.72 v61.08,16.89 64.76,16.89 v65.27,17.4 | v71.24,14.73 70.6,15.37 v68.19,15.37
SD_CLK
  Top 0.203: LSHIFT.2 37.96,31.24 33.77,27.05 28.82,27.05 27.55,25.78 26.41,25.78 SD.5
SD_CS  (via drill 0.3)
  Top 0.203: LSHIFT.6 32.88,31.24 31.61,29.97 28.69,29.97 28.06,29.34 v23.87,29.34 | v22.34,27.81 22.34,18.41 25.01,15.75 26.28,15.75 SD.1
  Bottom 0.203: v22.34,27.81 v23.87,29.34
SD_DI
  Top 0.203: LSHIFT.4 35.42,30.61 32.38,27.56 28.69,27.56 27.8,26.67 24.12,26.67 23.87,26.42 23.87,20.07 25.64,18.29 26.28,18.29 SD.2
SDA  (via drill 0.3)
  Top 0.203: v47.36,14.73 47.62,14.73 49.65,16.76 MCU.27 | RN2.8 47.87,11.43 47.36,11.43 v45.71,13.08 45.71,12.95 43.55,12.95 42.28,11.68 42.28,10.67 43.42,9.53 53.2,9.53 v53.46,9.27 | 69.84,11.94 71.62,11.94 v73.9,9.65 | v63.74,11.43 69.33,11.43 69.84,11.94 | 69.84,11.94 Q3.3
  Bottom 0.203: v47.36,14.73 v45.71,13.08 | v73.9,9.65 79.75,3.81 H1.9 | v53.46,9.27 55.23,9.27 57.14,7.37 59.68,7.37 v63.74,11.43
SDA_3V3  (via drill 0.3)
  Top 0.203: v51.43,15.11 50.16,13.84 49.14,13.84 RN2.4 | v55.23,18.92 55.87,18.92 56,19.05 58.03,19.05 58.09,18.99 | 58.09,18.99 58.92,18.16 U1.7 | Q3.2 69.08,13.97 67.68,13.97 64.38,17.27 64.38,17.4 64,17.78 61.84,17.78 60.57,19.05 58.16,19.05 58.09,18.99
  Bottom 0.203: v55.23,18.92 v51.43,15.11
TX-O  (via drill 0.3)
  Top 0.203: RN1.7 86.86,3.17 85.08,3.17 84.32,2.41 78.22,2.41 76.82,3.81 H1.8 | v51.93,17.14 51.68,17.4 51.68,18.16 MCU.31
  Bottom 0.203: v51.93,17.14 51.93,17.78 62.86,28.7 72.76,28.7 74.67,26.8 74.67,16.26 73.14,14.73 73.14,7.75 76.7,4.19 76.7,3.81 H1.8
VBAT
  Top 0.203: 84,29.15 84.06,29.08 84.06,28.83 | 84,29.15 81.52,31.62 76.95,31.62 IC1.1 | 84.06,28.83 84.06,28.57 Q1.3 84.06,28.83 | 84,29.15 89.78,34.92 96.26,34.92 CN1.1 | 84.06,28.83 87.24,25.65 J1.PWR
VCC  (via drill 0.3)
  Top 0.203: L_LPF.1 48.89,31.62 48.89,40.26 48.63,40.51 H3.5 | v16.88,40.01 16.88,38.23 23.1,32 23.1,18.29 24.12,17.27 27.8,17.27 29.71,15.37 30.6,15.37 C14.A1 | H3.5 46.98,40.51 44.19,43.31 19.55,43.31 ISP.2 | RN2.2 49.14,12.06 49.14,11.43 RN2.1 49.14,11.3 51.3,11.3 51.81,10.79 v53.97,10.79 | 61.71,8.13 61.84,8.13 66.16,3.81 H1.5 | 61.71,8.13 v57.9,8.13 | 61.46,12.7 61.46,10.92 61.71,10.67 61.71,8.13 | 76.82,27.81 76.82,28.96 IC1.6 | 76.82,27.81 76.82,26.92 RSTAT.2 76.7,26.92 75.55,25.78 70.47,25.78 | 76.82,27.81 79.36,27.81 COUT.1 | 79.75,27.69 79.36,27.69 COUT.1 | 79.75,27.69 81.91,27.69 Q1.2 | 79.75,27.69 83.05,24.38 Q2.2 | 79.75,27.69 COUT.1 | MCU.4 53.46,20.45 53.58,20.57 | 53.58,20.57 53.58,21.34 53.46,21.46 MCU.6 | 61.39,22.16 59.05,19.81 54.35,19.81 53.58,20.57 | 61.39,22.16 61.46,22.23 62.47,22.23 RCKL1.2 62.6,22.35 62.98,22.35 65.14,24.51 66.66,24.51 | 70.54,28 70.98,27.56 C_BOOST_1.2 | 70.54,28 69.59,28.96 69.59,30.23 5V_CHARGE_PUMP.2 | 70.47,25.78 70.47,27.94 70.54,28 | 70.47,25.78 70.47,24.51 | 70.47,24.51 70.47,21.97 CLOCK_CIN1.1 70.47,21.84 71.11,21.21 3V3.6 | 70.47,24.51 66.66,24.51 | 61.46,12.7 61.46,12.95 v62.47,13.97 | v61.33,22.35 61.33,22.23 61.39,22.16 | 61.46,12.7 R_RESET.2 | 66.66,24.51 57.65,33.53 57.65,40.39 56.12,41.91 51.55,41.91 50.03,40.39 48.89,40.39 H3.5
  Bottom 0.203: v16.88,40.01 16.88,40.64 ISP.2 | v53.97,10.79 54.35,10.79 57.01,8.13 v57.9,8.13 | v62.47,13.97 62.86,13.97 66.03,17.14 66.03,17.65 v61.33,22.35
VDD  (via drill 0.3)
  Top 0.203: v63.62,24 59.81,24 58.92,23.11 U1.2 58.92,21.59 v57.9,20.57 | v65.78,21.84 66.28,21.84 68.06,20.07 CLOCK_CIN3.1 68.19,19.94 69.59,18.54 70.35,18.54 | 28.63,21.4 26.91,23.11 26.41,23.11 SD.4 | 28.63,21.4 28.69,21.34 28.69,18.03 30.34,16.38 30.72,16.38 31.36,15.75 31.36,15.37 C14.B1 | RN2.6 47.87,13.08 47.87,13.72 RN2.5 47.87,13.84 47.23,13.84 46.28,14.8 | 46.28,14.8 45.96,15.11 v45.96,19.56 | v44.95,20.57 44.95,22.35 43.11,24.19 | 43.11,24.19 39.23,28.07 LSHIFT.1 | 43.11,24.19 42.41,23.5 31.23,23.5 29.2,21.46 28.69,21.46 28.63,21.4 | v48,16.13 47.62,16.13 46.28,14.8 | Q4.1 73.4,13.84 72.76,13.21 71.24,13.21 70.6,13.84 Q3.1 70.47,13.97 70.35,14.1 70.35,18.54 | 70.35,18.54 3V3.2
  Bottom 0.203: v65.78,21.84 v63.62,24 | v44.95,20.57 v45.96,19.56 | v57.9,20.57 53.71,16.38 53.33,16.38 52.19,15.24 52.19,14.86 51.68,14.35 49.77,14.35 v48,16.13
VUSB  (via drill 0.3)
  Top 0.203: U2.12 78.35,16.89 78.35,18.92 79.24,19.81 C17.1 | Q2.3 79.11,23.37 79.05,23.3 | 79.05,23.3 78.48,22.73 C21.A | C17.1 79.11,19.81 79.11,23.24 79.05,23.3 | RN1.6 86.86,4.19 86.86,4.83 RN1.5 86.86,4.95 86.86,10.41 86.35,10.92 86.35,12.7 87.49,13.84 JP5.VBUS | C17.1 84.44,19.81 v87.24,17.02
  Bottom 0.203: v87.24,17.02 87.24,14.22 87.49,13.97 JP5.VBUS
X0
  Top 0.203: MCU.7 52.95,21.97 53.97,21.97 56.63,24.64 58.54,24.64 59.43,25.53 CX0.2 59.55,25.53 XTAL.2
X1
  Top 0.203: MCU.8 52.95,22.48 52.95,23.75 53.46,24.26 53.46,25.53 CX1.2 53.58,25.53 53.58,28.32 XTAL.1

## Text on the board
tPlace: v2.0.0 | GND | MOSI | MISO | TM | SCK | VCC | D9 | D6 | 3V3 | 5V | GND | 1 | 3.7-5.0V | TM | TM | 3.7--5.0V | A0 | A1 | A2 | A3 | A6 | A7 | ALog BottleLogger v. 2.0.0 / 07 February 2017 / Andy Wickert / Chad Sandell / University of Minnesota / and Northern Widget LLC | GND | A0 | 3V3 | A1 | 3V3 | A2 | GND | A3 | 3V3 | A6 | 3V3 | A7 | D3- / INT1 | 5V | VCC | GND | RX | TX | SDA | SCL | Rx | Tx
bPlace: ALog BottleLogger v2.0.0 / 07 February 2017 / Andy Wickert / Chad Sandell